# Altium PCB ESP32-PoE_Rev_G1.PcbDoc (part 3 of 3)
Units mm, origin at the board's own origin, x right, y up, seen from the top; angles counter-clockwise.
Board outline 28 x 75 mm, 2 copper layers (F.Cu, B.Cu); 132 components, 123 nets, 484 pads, 212 vias.
Unrouted connection lines stored in the file: 2.
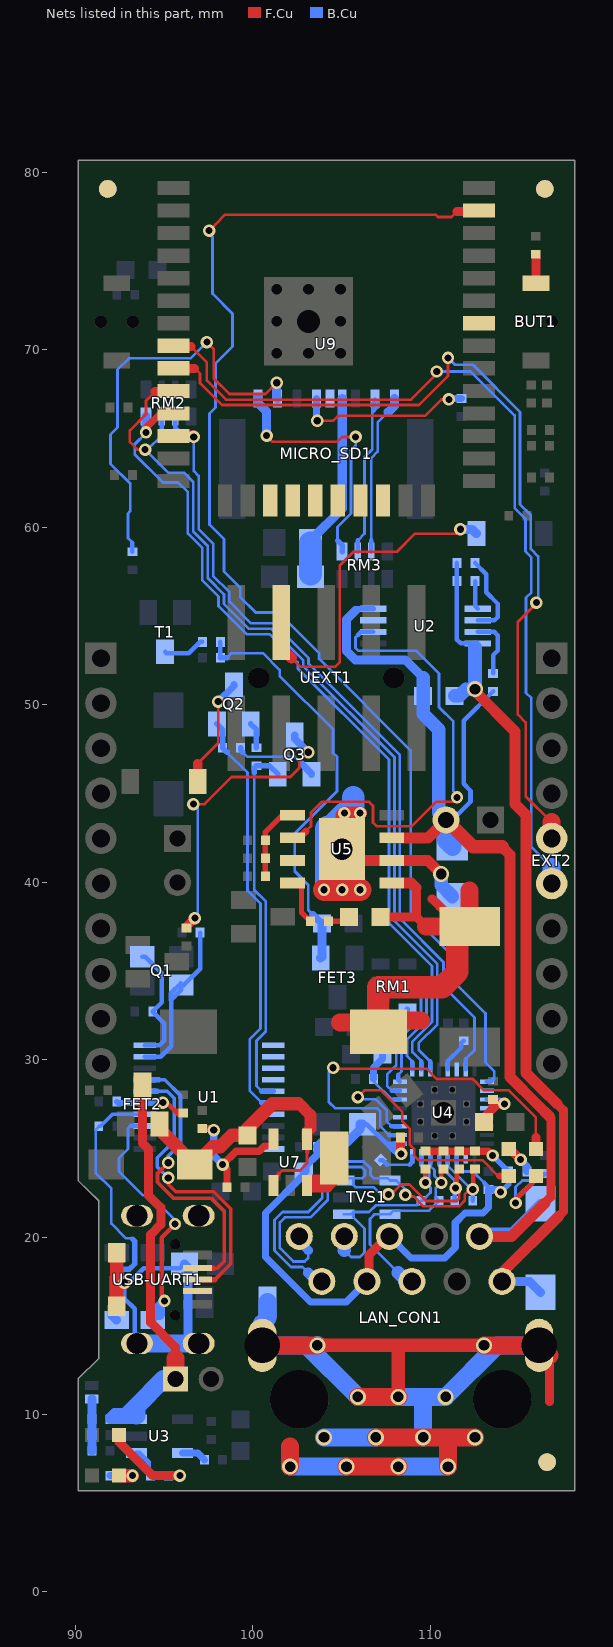
[diagram p3: the nets of this part, all layers, seen from the top]

## Via types
v1: diameter 0.7, hole 0.4, F.Cu to B.Cu, tented both sides, 119 vias
v2: diameter 0.9, hole 0.6, F.Cu to B.Cu, tented both sides, 89 vias
v3: diameter 0.8, hole 0.5, F.Cu to B.Cu, tented both sides, 4 vias

## Nets (pads, with @x,y where several pads share a name; then routed paths per layer and width w, separated by ;. In a path a pad name is that pad's centre, name@x,y a point inside that pad or via, vN(x,y) a via of type N, cw(c..) or ccw(c..) an arc to the next point about the centre after c; other vN are vias at no path point) (continued)
GPIO23\MDC(RMII): U4.17 U9.37 | length 72.5
  F.Cu w0.152: v1(97.536,76.723) 97.886,77.073 98.438,77.624 110.287,77.624 110.426,77.485 111.188,77.485 111.506,77.802
  F.Cu w0.508: 111.506,77.802 112.691,77.802 U9.37@112.74,77.851
  B.Cu w0.152: v1(97.536,76.723) 97.536,76.532 97.727,76.342 97.727,73.167 98.857,72.036 98.857,70.192 97.892,69.227 97.892,66.753 97.557,66.418 97.557,60.15 98.374,59.332 98.374,57.519 99.289,56.604 99.289,56.072 100.165,55.196 101.448,55.196 103.749,52.895 103.749,52.57 108.894,47.424 108.894,38.209 111.506,35.597 111.506,34.216 113.111,32.61 113.111,29.842 113.602,29.352 113.602,28.971 113.538,28.907
  B.Cu w0.254: U4.17@113.194,28.752 113.383,28.752 113.538,28.907
GPIO25\EMAC_RXD0(RMII): RM2.2.2 U4.11 U9.10 | length 51.6
  F.Cu w0.152: v1(93.932,64.378) 93.497,64.378 93.066,64.81 93.066,65.458 93.98,66.372 93.98,67.134 94.488,67.642
  F.Cu w0.508: 94.488,67.642 95.491,67.642 U9.10@95.54,67.691
  B.Cu w0.152: 94.869,65.179 94.068,64.378 v1(93.932,64.378) 95.24,63.07 96.139,63.07 96.642,62.567 96.642,59.771 97.46,58.953 97.46,57.14 98.374,56.226 98.374,55.686 99.779,54.282 101.067,54.282 102.834,52.514 102.834,52.189 107.98,47.043 107.98,37.821 110.399,35.401 110.399,31.991 109.347,30.939 109.347,30.558 109.994,29.911
  B.Cu w0.254: 94.869,65.179 RM2.2.2@94.869,66.245 ; U4.11@109.994,29.452 109.994,29.911
GPIO26\EMAC_RXD1(RMII): RM2.1.2 U4.10 U9.11 | length 48.1
  F.Cu w0.406: v1(93.98,65.355) 93.98,65.61 94.791,66.421 U9.11@95.54,66.421
  B.Cu w0.152: v1(93.98,65.355) 93.98,65.318 93.345,64.683 93.345,64.111 94.929,62.528 95.792,62.528 96.337,61.983 96.337,59.645 97.155,58.827 97.155,57.014 98.069,56.099 98.069,55.559 99.652,53.977 100.94,53.977 102.53,52.387 102.53,52.059 107.675,46.914 107.675,37.691 110.095,35.271 110.095,32.118 108.991,31.015 108.991,30.431 109.494,29.928 109.494,29.903
  B.Cu w0.254: U4.10@109.494,29.452 109.494,29.903
  B.Cu w0.508: v1(93.98,65.355) 93.98,65.85 RM2.1.2@93.98,66.245
GPIO27\EMAC_RX_CRS_DV: RM2.3.2 U4.15 U9.12 | length 46.2
  F.Cu w0.61: U9.12@95.54,65.151 96.624,65.151 v1(96.673,65.102)
  B.Cu w0.152: v1(96.673,65.102) 96.673,63.171 96.947,62.897 96.947,59.897 97.765,59.08 97.765,57.266 98.679,56.352 98.679,55.813 99.906,54.586 101.194,54.586 103.139,52.641 103.139,52.316 108.285,47.17 108.285,37.948 110.744,35.488 110.744,34.114 112.494,32.364 112.494,30.53 111.994,30.03
  B.Cu w0.254: RM2.3.2@95.631,66.245 95.631,65.61 96.139,65.102 v1(96.673,65.102) ; U4.15@111.994,29.452 111.994,30.03
GPIO32: EXT2.6 U9.8 | length 50.7
  F.Cu w0.152: U9.8@95.123,70.182 U9.8@95.537,70.182 ; 96.52,70.182 97.409,69.293 97.409,68.277 98.489,67.198 108.915,67.198 110.363,68.645 v1(110.363,68.785)
  F.Cu w0.508: U9.8@95.54,70.231 95.589,70.182 96.52,70.182
  B.Cu w0.152: v1(110.363,68.785) 112.268,68.785 114.755,66.298 114.755,61.091 115.367,60.479 115.367,58.642 115.697,58.311 115.697,56.339 115.392,56.034 115.392,50.675 115.697,50.37 115.697,41.988 116.84,40.845
  B.Cu w1.016: EXT2.6@116.84,39.926 116.84,40.845
GPIO33: EXT2.5 U9.9 | length 49.4
  F.Cu w0.152: 96.725,68.961 97.028,68.658 97.028,68.123 98.258,66.893 109.36,66.893 110.998,68.531 110.998,69.052 v1(110.998,69.547) ; v1(115.976,55.755) 115.976,55.722 114.935,54.68 114.935,49.449 115.379,49.005 115.379,44.846 116.84,43.385
  F.Cu w0.508: U9.9@95.54,68.961 96.725,68.961
  F.Cu w1.016: EXT2.5@116.84,42.466 116.84,43.385
  B.Cu w0.152: v1(110.998,69.547) 111.379,69.166 112.395,69.166 115.059,66.502 115.059,61.295 115.671,60.683 115.671,58.768 116.078,58.362 116.078,55.856 v1(115.976,55.755)
Net-(ACT1-Pad1): ACT1.1 R15.1 | length 4.9
  F.Cu w0.305: v1(114.808,21.922) 114.808,22.116 115.951,23.259 ACT1.1@115.951,23.446
  B.Cu w0.152: v1(114.808,21.922) 114.808,22.811 115.189,23.192 116.078,23.192 116.205,23.319
  B.Cu w0.254: 116.205,23.319 R15.1@116.459,23.573
Net-(ACT1-Pad2): ACT1.2 U4.3 | length 15.1
  F.Cu w0.152: v1(105.918,27.891) 106.299,28.272 107.213,28.272 108.417,27.068 108.417,26.535 108.839,26.113 108.839,25.224 109.093,24.97 109.093,24.589 109.347,24.335 112.932,24.335 113.821,23.446 113.919,23.446
  F.Cu w0.406: 113.919,23.446 ACT1.2@114.427,23.446
  B.Cu w0.152: v1(105.918,27.891) 106.045,27.764 106.934,27.764 107.544,27.154 107.544,26.519 107.811,26.252
  B.Cu w0.254: 107.811,26.252 U4.3@108.294,26.252
Net-(BAT1-Pad1): BAT1.1 FET2.3 R17.1 U3.3 | length 25.5
  F.Cu w0.508: FET2.3@93.787,28.577 93.787,25.29 94.112,24.965 94.112,22.357 94.813,21.657 94.813,20.723 94.234,20.144 94.234,15.191 95.631,13.794 95.631,13.159 ; BAT1.1@95.639,11.993 BAT1.1@95.989,11.993
  F.Cu w1.016: BAT1.1@95.631,12.016 95.631,13.159
  B.Cu w0.406: U3.3@93.442,9.728 U3.3@93.442,9.954
  B.Cu w0.508: 93.218,10.111 92.202,10.111 91.948,9.857 R17.1@91.948,9.73 91.95,9.728 U3.3@93.442,9.728
  B.Cu w1.016: U3.3@92.964,9.984 93.442,10.462 ; U3.3@93.442,9.954 93.442,10.462 ; BAT1.1@95.631,12.001 BAT1.1@95.639,11.993 ; BAT1.1@95.639,11.897 BAT1.1@95.639,11.993 ; 93.442,10.462 94.973,11.993 BAT1.1@95.639,11.993
Net-(BAT_SENS_E1-Pad2): BAT_SENS_E1.2 C19.1 R17.2 R22.1 | length 2.9
  B.Cu w0.508: C19.1@90.932,7.952 R22.1@90.932,8.841 R17.2@90.932,9.73 90.932,10.619 BAT_SENS_E1.2@90.932,10.873
Net-(BUT1-Pad2): BUT1.2 R47.1 | length 1.6
  F.Cu w0.508: R47.1@115.951,75.389 115.951,73.764 BUT1.2@115.959,73.756
Net-(C2-Pad2): C2.2 LAN_CON1.0 | length 70.5
  F.Cu w0.508: 116.713,10.746 LAN_CON1.0@116.713,13.318
  F.Cu w0.762: v2(103.632,13.9) 108.183,13.9 ; v2(108.204,11) 108.204,13.879 108.183,13.9 ; v2(113.03,13.9) 108.183,13.9
  F.Cu w1.016: LAN_CON1.0@100.531,13.9 v2(103.632,13.9) ; v2(102.108,7.063) 102.108,8.206 ; v2(105.283,7.063) v2(108.204,7.063) ; v2(105.918,11) v2(108.204,11) ; v2(106.934,8.714) v2(109.601,8.714) 110.998,8.714 ; v2(110.998,7.063) 110.998,8.714 ; v2(112.522,8.714) 110.998,8.714 ; v2(113.03,13.9) LAN_CON1.0@116.131,13.9 LAN_CON1.0@116.713,13.318
  B.Cu w0.508: LAN_CON1.0@116.131,13.9 116.713,13.318 116.713,10.873
  B.Cu w1.016: C2.2@100.838,16.334 100.838,15.445 100.531,15.138 LAN_CON1.0@100.531,13.9 103.018,13.9 v2(105.918,11) v2(108.204,11) 109.601,11 ; v2(102.108,7.063) v2(105.283,7.063) ; v2(103.632,13.9) v2@103.64,13.908 ; v2(104.013,8.714) v2(106.934,8.714) ; v2(108.204,7.063) v2(110.998,7.063) ; v2(109.601,8.714) 109.601,11 ; LAN_CON1.0@116.131,13.9 113.771,13.9 v2(110.871,11) 109.601,11
Net-(C3-Pad1): C3.1 L5.2 MICRO_SD1.4 | length 10.6
  B.Cu w0.508: C3.1@103.251,59.133 103.251,59.26 105.04,61.049 105.04,66.251 MICRO_SD1.4@105.04,67.259
  B.Cu w1.27: L5.2@103.251,57.355 C3.1@103.251,59.133
Net-(C4-Pad1): C4.1 Q1.1 U1.9 | length 10.1
  B.Cu w0.254: U1.9@93.916,30.166 94.805,30.166 95.402,30.763 95.402,33.327 95.377,33.352 ; Q1.1@95.948,34.305 95.377,33.733 95.377,33.352 ; C4.1@97.028,37.162 97.028,35.13 96.101,34.203 Q1.1@95.969,34.203 95.969,33.944 95.377,33.352
Net-(C5-Pad1): C5.1 Q1.2 U1.10 | length 6.9
  B.Cu w0.254: Q1.2@93.769,35.803 93.942,35.803 94.869,34.876 94.869,33.225 C5.1@94.361,32.717 94.361,32.692 94.996,32.057 94.996,31.074 94.738,30.816 U1.10@93.916,30.816
Net-(C6-Pad1): C6.1 D3.1 FET2.2 U7.1 U7.4 | length 17
  F.Cu w0.152: 101.473,23.573 101.651,23.751 102.667,23.751 103.058,24.142 103.058,24.782
  F.Cu w0.254: U7.1@101.158,22.908 101.158,23.258 101.473,23.573 ; 103.058,24.782 U7.4@103.058,25.508
  F.Cu w0.406: D3.1@96.734,24.081 D3.1@96.734,24.168
  F.Cu w0.61: 102.562,27.505 102.621,27.505 ; U7.4@103.058,25.508 103.058,25.92 103.251,26.113
  F.Cu w0.66: 102.621,27.505 103.251,26.875 103.251,26.113
  F.Cu w0.762: FET2.2@94.742,26.367 94.742,26.073 D3.1@96.734,24.081 97.75,25.097 98.171,25.097 98.806,25.732 C6.1@99.695,25.732 99.695,26.113 101.087,27.505 102.562,27.505
Net-(C8-Pad1): C8.1 R19.1 U1.5 | length 4.6
  F.Cu w0.254: v1(94.932,27.574) 95.123,27.574 95.14,27.574 95.585,27.129 ; C8.1@96.075,26.875 95.839,26.875 95.585,27.129 ; C8.1@96.075,27.002 95.948,27.129 95.585,27.129
  B.Cu w0.203: v1@94.925,27.566 v1(94.932,27.574)
  B.Cu w0.305: R19.1@92.329,27.637 R19.1@92.4,27.566
  B.Cu w0.33: R19.1@92.4,27.566 U1.5@93.916,27.566 v1@94.925,27.566
Net-(C10-Pad2): C10.2 FET3.1 R2.2 R3.1 | length 23.9
  B.Cu w0.152: 98.552,52.656 98.806,52.91 100.566,52.91 101.514,51.963 101.514,51.63 104.521,48.622 104.521,47.292 104.739,47.073 104.739,45.127 102.362,42.75 102.362,40.616 103.124,39.854 103.124,38.432 103.378,38.178
  B.Cu w0.254: R2.2@98.171,52.656 R3.1@98.171,53.545
  B.Cu w0.305: R2.2@98.171,52.656 98.552,52.656
  B.Cu w0.406: 103.378,38.178 C10.2@103.886,37.67
  B.Cu w0.508: FET3.1@103.825,35.729 103.886,35.79 C10.2@103.886,37.67
Net-(C11-Pad1): C11.1 C13.1 C15.1 C16.1 L1.2 LAN_CON1.4 LAN_CON1.5 R10.1 R11.1 R12.1 R13.1 R14.1 U4.1 U4.27 | length 46.7
  F.Cu w0.406: R11.1@109.728,24.843 R10.1@110.744,24.843 R13.1@111.633,24.843 R12.1@112.522,24.843 113.263,24.843 v1(113.51,24.596)
  F.Cu w0.508: LAN_CON1.4@106.426,17.5 106.553,17.627 106.553,19.001 107.592,20.04 LAN_CON1.5@107.696,20.04 ; C11.1@108.331,25.605 108.331,24.716 v1(108.356,24.691)
  B.Cu w0.152: 111.494,24.093 111.887,23.7 112.395,23.7 113.03,23.065
  B.Cu w0.254: L1.2@106.299,26.367 L1.2@106.172,26.367 106.426,26.367 107.541,25.252 ; U4.1@108.557,25.252 U4.1@108.294,25.252 ; 111.494,24.093 U4.27@111.494,24.552 ; 113.03,23.065 113.284,22.811 C15.1@113.284,22.684 ; 107.541,25.252 107.95,24.843 ; 107.541,25.252 U4.1@108.294,25.252 ; 107.95,24.843 107.95,25.097 108.105,25.252 U4.1@108.294,25.252 ; 107.95,24.843 108.102,24.691 v1(108.356,24.691) 108.204,24.843 108.204,25.162 U4.1@108.294,25.252
  B.Cu w0.305: v1(113.51,24.596) 114.406,23.7 R14.1@114.427,23.7 114.427,22.989 v1(113.97,22.532)
  B.Cu w0.406: C13.1@102.87,23.7 102.87,23.517 100.711,21.358 100.711,18.874 103.251,16.334 105.26,16.334 LAN_CON1.4@106.426,17.5 ; C13.1@102.997,23.7 102.997,24.002 103.632,24.637 C16.1@103.632,25.097 ; L1.2@106.045,26.304 L1.2@106.045,26.367 ; LAN_CON1.5@107.696,20.04 108.913,18.823 110.82,18.823 111.404,19.407 111.404,20.804 111.963,21.363 112.979,21.363 113.284,21.668 C15.1@113.284,22.684 113.817,22.684 v1(113.97,22.532)
  B.Cu w0.508: C16.1@103.632,25.097 103.861,25.326 105.289,25.326 106.045,26.081 L1.2@106.045,26.304 ; L1.2@106.045,26.367 L1.2@106.172,26.367 ; LAN_CON1.5@107.696,20.04 LAN_CON1.5@107.696,20.144
Net-(C12-Pad1): C12.1 D5.1 L4.1 U5.1 | length 28.4
  F.Cu w0.508: C12.1@107.188,38.051 109.22,38.051 ; 109.202,39.684 109.22,39.667 109.22,38.051 ; 109.757,37.514 109.22,38.051 ; 110.109,39.067 111.662,37.514 D5.1@112.217,37.514
  F.Cu w0.61: U5.1@107.829,39.956 108.931,39.956 109.202,39.684
  F.Cu w1.016: 104.902,32.082 106.569,32.082 L4.1@107.077,31.574 107.712,32.209 109.474,32.209 ; 109.757,37.514 D5.1@112.217,37.514 112.217,39.524
  F.Cu w1.27: L4.1@107.077,31.574 107.077,34.079 110.67,34.079 111.532,34.941 111.532,36.829 D5.1@112.217,37.514
Net-(C12-Pad2): C12.2 R33.2 | length 1.2
  F.Cu w0.305: R33.2@104.267,37.797 105.156,37.797 C12.2@105.41,38.051
Net-(C17-Pad1): C17.1 C18.1 U4.6 | length 3.6
  B.Cu w0.152: C18.1@106.807,28.907 106.807,28.78 107.835,27.752 U4.6@107.898,27.752
  B.Cu w0.254: U4.6@107.898,27.752 U4.6@108.294,27.752
  B.Cu w0.406: C18.1@106.807,28.907 106.807,29.415 106.807,29.542 107.315,30.05 C17.1@107.315,30.304
Net-(C21-Pad2): C21.2 R25.1 U4.19 | length 3.3
  F.Cu w0.508: C21.2@113.03,26.494 113.03,26.748 113.602,27.32 ; R25.1@113.538,27.764 113.538,27.383 113.602,27.32 ; v1(114.173,27.51) 113.792,27.51 113.602,27.32
  B.Cu w0.254: U4.19@113.194,27.752 113.931,27.752 v1(114.173,27.51)
Net-(C23-Pad2): C23.2 R34.1 R38.2 U5.5 | length 4.4
  F.Cu w0.305: R38.2@100.711,40.337 C23.2@100.711,41.353 R34.1@100.711,42.369 100.711,42.828 101.649,43.766 U5.5@102.229,43.766
Net-(CHRG1-Pad1): CHRG1.1 R8.1 | length 6.5
  F.Cu w0.254: CHRG1.1@92.456,8.841 CHRG1.1@92.456,8.968 ; 94.742,6.555 95.39,6.555 v1(95.885,6.555)
  F.Cu w0.508: CHRG1.1@92.456,8.841 92.456,8.46 94.361,6.555 94.742,6.555 v1(95.885,6.555)
  B.Cu w0.508: R8.1@95.25,6.555 v1(95.885,6.555)
Net-(D4-Pad1): D4.1 UEXT1.4 | length 17.9
  F.Cu w0.152: 102.184,52.631 102.667,52.148 104.648,52.148 104.902,52.402 104.902,57.863 105.664,58.625 108.127,58.625 109.143,59.641 111.446,59.641 v1(111.697,59.892)
  F.Cu w0.61: UEXT1.4@101.6,53.215 102.184,52.631
  B.Cu w0.508: v1(111.697,59.892) 112.191,59.892 112.359,59.892 D4.1@112.6,59.651
Net-(D6-Pad1): D6.1 U1.3 | length 15.4
  F.Cu w0.254: v1(95.02,16.409) 94.869,16.56 94.869,19.973 95.613,20.718 v1(95.613,20.736)
  B.Cu w0.152: 93.117,26.266 92.964,26.113 92.964,24.97 92.456,24.462 92.456,23.7 93.802,22.354 94.234,22.354 95.613,20.975 v1(95.613,20.736)
  B.Cu w0.254: 93.117,26.266 U1.3@93.916,26.266
  B.Cu w0.508: D6.1@94.297,15.572 94.297,15.686 v1(95.02,16.409) 94.805,16.194 94.805,15.636 94.742,15.572 94.483,15.572 D6.1@94.361,15.45
Net-(D7-Pad2): D7.2 R18.2 U1.4 | length 15.9
  B.Cu w0.152: R18.2@91.313,26.24 91.313,26.215 91.14,26.042 91.14,23.614 92.024,22.73 92.024,20.753 92.836,19.941 93.167,19.941 93.218,19.89
  B.Cu w0.203: R18.2@91.313,26.24 91.415,26.24 92.091,26.916 U1.4@93.916,26.916
  B.Cu w0.305: 92.075,16.08 92.075,17.731 92.532,18.188 93.04,18.188 93.345,18.493 93.345,19.763 93.218,19.89
  B.Cu w0.508: 92.075,16.08 92.075,15.577 D7.2@92.329,15.323
Net-(D9-Pad1): D9.1 Q2.3 | length 6.3
  F.Cu w0.152: 96.896,46.682 98.044,47.83 98.044,50.169 v1(98.052,50.177)
  F.Cu w0.508: D9.1@96.896,45.671 96.896,46.682
  B.Cu w0.406: v1(98.052,50.177) 98.933,51.058 Q2.3@98.933,51.132
Net-(FID1-PadFid1): FID1.Fid1
Net-(FID2-PadFid1): FID2.Fid1
Net-(FID3-PadFid1): FID3.Fid1
Net-(FID4-PadFid1): FID4.Fid1
Net-(FID5-PadFid1): FID5.Fid1
Net-(FID6-PadFid1): FID6.Fid1
Net-(L2-Pad1): L2.1 U7.3 | length 4.9
  F.Cu w0.406: L2.1@104.972,24.278 L2.1@104.972,24.843
  F.Cu w0.508: L2.1@104.591,24.462 104.591,23.897 103.962,23.268 103.418,23.268 U7.3@103.058,22.908 103.187,22.779 104.235,22.779 L2.1@104.648,23.192
Net-(L3-Pad1): L3.1 USB-UART1.0 | length 19.7
  F.Cu w0.762: USB-UART1.0@92.326,16.104 92.326,17.861 ; USB-UART1.0@92.326,19.104 92.326,17.861 ; v1(92.761,17.426) 92.326,17.861
  B.Cu w0.254: USB-UART1.0@93.476,14.004 93.453,14.004 93.345,14.112 93.345,15.953 92.761,16.537 v1(92.761,17.426) 93.04,17.426 93.853,18.239 95.885,18.239 L3.1@96.139,18.493
  B.Cu w0.508: L3.1@96.139,18.493 96.342,18.29 96.342,14.429 96.767,14.004 USB-UART1.0@96.946,14.004
  B.Cu w0.762: USB-UART1.0@93.476,14.004 USB-UART1.0@93.476,14.249 ; USB-UART1.0@97.409,21.16 USB-UART1.0@97.409,21.287
  B.Cu w1.016: USB-UART1.0@93.476,14.004 95.65,14.004 96.603,14.004 USB-UART1.0@96.647,14.048
Net-(LNK1-Pad1): LNK1.1 U4.2 | length 21.7
  F.Cu w0.152: v1(104.521,29.542) 104.572,29.491 109.776,29.491 110.36,28.907 112.395,28.907 113.03,28.272 114.427,28.272 115.951,26.748 115.951,25.605
  F.Cu w0.508: LNK1.1@115.951,24.97 115.951,25.605
  B.Cu w0.152: v1(104.521,29.542) 104.276,29.297 104.276,27.628 104.648,27.256 107.011,27.256 107.188,27.079 107.188,26.24 107.676,25.752
  B.Cu w0.254: 107.676,25.752 U4.2@108.294,25.752
Net-(LNK1-Pad2): LNK1.2 R14.2 | length 1.7
  F.Cu w0.508: LNK1.2@114.427,24.97 114.483,24.97 v1(115.09,24.363)
  B.Cu w0.406: v1(115.09,24.363) 115.443,24.01 R14.2@115.443,23.7
Net-(MICRO_SD1-Pad1): MICRO_SD1.1 RM3.3.1 | length 9.2
  B.Cu w0.152: 106.68,59.26 106.68,63.908 107.036,64.264 107.036,65.915 107.62,66.499
  B.Cu w0.254: RM3.3.1@106.68,58.625 106.68,59.26
  B.Cu w0.508: 107.632,66.499 107.99,66.857 MICRO_SD1.1@107.99,67.259
Net-(MICRO_SD1-Pad2): MICRO_SD1.2 RM3.2.1 | length 10.8
  B.Cu w0.152: 105.918,59.26 106.299,59.641 106.299,63.959 106.731,64.391 106.731,66.423 ; 106.731,66.423 106.731,66.639 ; 106.731,66.423 106.731,66.455 107.061,66.785 107.061,67.088 MICRO_SD1.2@106.89,67.259 ; 106.731,66.639 106.89,66.798 MICRO_SD1.2@106.89,67.259 ; 106.731,66.639 106.731,66.994 106.89,67.154 MICRO_SD1.2@106.89,67.259
  B.Cu w0.254: RM3.2.1@105.918,58.625 105.918,59.26
Net-(MICRO_SD1-Pad5): MICRO_SD1.5 R40.2 | length 9.9
  F.Cu w0.152: v1(103.632,66.009) 104.539,66.009 104.813,66.283 109.703,66.283 110.627,67.208 v1(111.051,67.208)
  B.Cu w0.406: MICRO_SD1.5@103.59,67.259 103.59,66.051 v1(103.632,66.009) ; v1(111.051,67.208) 111.104,67.261 R40.2@111.76,67.261
Net-(MICRO_SD1-Pad7): MICRO_SD1.7 R46.2 | length 24
  F.Cu w0.152: v1(97.409,70.436) 97.79,70.055 97.79,68.404 98.679,67.515 100.711,67.515 v1(101.346,68.15)
  B.Cu w0.152: 93.218,59.133 92.964,59.387 92.964,60.784 93.091,60.911 93.091,62.462 91.973,63.579 91.973,65.221 92.377,65.625 92.377,68.883 93.016,69.522 96.495,69.522 v1(97.409,70.436)
  B.Cu w0.254: R46.2@93.218,58.625 93.218,59.133
  B.Cu w0.508: v1(101.346,68.15) 101.346,67.303 MICRO_SD1.7@101.39,67.259
Net-(MICRO_SD1-Pad8): MICRO_SD1.8 RM3.1.1 | length 14.6
  F.Cu w0.152: v1(100.774,65.166) 101.119,64.821 104.748,64.821 105.022,65.095 v1(105.796,65.095)
  B.Cu w0.152: 104.775,59.26 104.775,60.022 105.537,60.784 105.537,64.34 105.796,64.6 v1(105.796,65.095)
  B.Cu w0.305: 104.775,59.26 105.029,59.006 RM3.1.1@105.029,58.625
  B.Cu w0.508: MICRO_SD1.8@100.29,67.259 100.29,67.009 100.774,66.524 v1(100.774,65.166)
Net-(MICRO_SD1-PadCD1): MICRO_SD1.CD1
Net-(PWR1-Pad1): PWR1.1 R5.1 | length 2
  F.Cu w0.762: PWR1.1@92.456,6.555 v1@93.217,6.555
  B.Cu w0.406: R5.1@91.948,6.555 v1@93.217,6.555
  other v1: 93.217,6.554
Net-(Q2-Pad1): Q2.1 R20.2 | length 1.5
  B.Cu w0.305: Q2.1@99.88,48.922 100.203,48.6 R20.2@100.203,47.576
Net-(Q2-Pad2): Q2.2 R21.1 U1.16 | length 23.6
  B.Cu w0.152: 98.552,47.322 99.695,46.179 99.695,39.524 100.432,38.788 100.432,31.752 99.822,31.142 99.822,28.257 100.513,27.566
  B.Cu w0.305: Q2.2@97.978,48.922 98.298,48.602 R21.1@98.298,47.576 98.552,47.322 ; 100.513,27.566 U1.16@101.155,27.566
Net-(Q3-Pad1): Q3.1 R21.2 | length 4.7
  B.Cu w0.152: R21.2@99.441,47.322 99.695,47.068 102.362,47.068 102.743,46.687
  B.Cu w0.305: R21.2@99.314,47.576 99.314,47.449 R21.2@99.441,47.322
  B.Cu w0.406: 102.743,46.687 103.312,46.118 Q3.1@103.312,46.088
Net-(Q3-Pad2): Q3.2 R20.1 U1.15 | length 21.1
  B.Cu w0.152: 100.076,46.179 100.076,39.575 100.736,38.915 100.736,31.599 100.203,31.066 100.203,28.526 100.513,28.216
  B.Cu w0.305: 100.076,46.179 100.076,46.433 R20.1@100.203,46.56 100.937,46.56 Q3.2@101.409,46.088 ; 100.513,28.216 U1.15@101.155,28.216
Net-(Q3-Pad3): Q3.3 R24.1 | length 16.6
  F.Cu w0.152: v1(96.647,44.401) 97.282,44.401 98.806,45.925 102.108,45.925 102.616,46.433 102.616,46.814 v1(103.124,47.322)
  F.Cu w0.508: R24.1@96.266,37.416 96.266,37.508 v1(96.73,37.972)
  B.Cu w0.152: v1(96.647,44.401) 96.901,44.147 96.901,38.143 v1(96.73,37.972)
  B.Cu w0.406: Q3.3@102.365,48.297 102.365,48.081 v1(103.124,47.322)
Net-(R3-Pad2): R3.2 T1.3 | length 2.4
  B.Cu w0.254: T1.3@95.054,52.986 95.131,52.91 96.393,52.91 97.028,53.545 R3.2@97.155,53.545
Net-(R6-Pad1): R6.1 U3.5 | length 1.4
  B.Cu w0.406: U3.5@96.042,7.828 96.899,7.828 R6.1@97.282,7.444
Net-(R7-Pad2): R7.2 U2.3 | length 3.5
  B.Cu w0.254: U2.3@112.678,54.109 113.609,54.109 113.792,53.926 113.792,53.037 113.538,52.783 R7.2@113.538,51.767
Net-(R8-Pad2): R8.2 U3.1 | length 1.7
  B.Cu w0.305: U3.1@93.442,7.828 93.597,7.828 94.107,7.317 94.107,6.682 R8.2@94.234,6.555
Net-(R23-Pad1): R23.1 U2.1 | length 1.6
  B.Cu w0.254: R23.1@112.522,56.974 112.522,55.565 U2.1@112.678,55.409
Net-(R26-Pad1): R26.1 U4.32 | length 2.3
  B.Cu w0.152: 107.569,24.081 107.696,24.081 108.839,24.081
  B.Cu w0.254: R26.1@107.188,24.335 107.315,24.335 107.569,24.081 ; 108.839,24.081 108.994,24.236 U4.32@108.994,24.552
Net-(R27-Pad2): R27.2 U2.2 | length 4.8
  B.Cu w0.254: R27.2@112.522,57.99 113.157,57.355 113.157,56.339 113.792,55.704 113.792,54.942 113.609,54.759 U2.2@112.678,54.759
Net-(R28-Pad1): R28.1 U5.2 U5.9 | length 25.2
  F.Cu w0.508: U5.9@105.029,41.861 U5.9@105.664,41.226
  F.Cu w0.61: U5.9@105.664,41.226 U5.2@107.829,41.226 109.855,41.226 v2(110.617,40.464)
  F.Cu w0.762: U5.9@105.029,41.861 105.029,43.766 v1(105.156,43.893) v1(106.045,43.893)
  F.Cu w1.27: v1(104.013,39.575) v1(106.045,39.575) ; v1(105.029,39.575) U5.9@105.029,41.861
  B.Cu w0.762: v2(110.617,40.464) 110.617,39.829 R28.1@111.252,39.194
  B.Cu w1.27: 104.267,43.004 v1(105.156,43.893) ; 105.537,40.083 105.537,42.242 105.41,42.242 U5.9@105.029,41.861 105.664,42.496 105.664,44.782
  B.Cu w1.524: 104.267,40.083 104.267,43.004
Net-(R29-Pad1): R29.1 R30.1 U7.5 | length 7.8
  F.Cu w0.406: R29.1@97.155,26.113 97.711,26.113 v1(97.795,26.029) ; R30.1@98.552,22.811 98.552,23.827 v1(98.298,24.081) 99.06,24.843 100.355,24.843 100.639,25.127 100.995,25.127 101.158,25.29 U7.5@101.158,25.508
  B.Cu w0.406: v1(97.795,26.029) 97.795,24.584 v1(98.298,24.081)
Net-(R33-Pad1): R33.1 U5.8 | length 2.7
  F.Cu w0.305: U5.8@102.229,39.956 102.464,39.956 102.743,39.677 102.743,38.305 R33.1@103.251,37.797
Net-(R41-Pad2): R41.2 U4.13 | length 2
  B.Cu w0.254: U4.13@110.994,29.452 110.994,29.919 111.76,30.685 111.76,30.939 R41.2@111.887,31.066
Net-(RM1-Pad1.2): RM1.1.2 U4.7 | length 5.6
  B.Cu w0.152: 107.843,28.252 107.569,28.526 107.569,29.161 108.077,29.669 108.077,31.447 108.712,32.082 108.712,32.336
  B.Cu w0.254: 107.843,28.252 U4.7@108.294,28.252
  B.Cu w0.305: 108.712,32.336 RM1.1.2@108.712,32.844
Net-(RM1-Pad2.2): RM1.2.2 U4.8 | length 6.2
  B.Cu w0.152: 108.204,29.161 108.382,29.339 108.382,31.272 109.474,32.364 109.474,33.479 109.22,33.733
  B.Cu w0.254: 108.204,29.161 108.204,28.842 U4.8@108.294,28.752
  B.Cu w0.305: RM1.2.2@108.712,33.733 109.22,33.733
Net-(RM1-Pad3.2): RM1.3.2 U4.9 | length 6.3
  B.Cu w0.152: 108.994,29.895 108.687,30.202 108.687,31.145 109.79,32.248 109.79,33.798 109.347,34.241
  B.Cu w0.254: RM1.3.2@108.712,34.495 109.093,34.495 109.347,34.241 ; U4.9@108.994,29.452 108.994,29.895
Net-(U1-Pad6): U1.6 USB-UART1.3 | length 16.8
  F.Cu w0.203: v1(95.232,23.333) 95.232,22.984 95.659,22.557 97.79,22.557 98.756,21.591 98.756,18.495 97.865,17.604
  F.Cu w0.305: USB-UART1.3@96.876,17.604 97.865,17.604
  B.Cu w0.203: 94.615,28.216 95.179,28.216 95.567,27.828 95.567,25.416 94.615,24.463 94.615,23.954 95.232,23.337 v1(95.232,23.333)
  B.Cu w0.305: U1.6@93.916,28.216 94.615,28.216
Net-(U1-Pad7): U1.7 USB-UART1.2 | length 16.7
  F.Cu w0.203: v1(95.232,24.192) 94.628,23.588 94.628,23.083 95.512,22.199 97.645,22.199 98.4,21.444 98.4,18.643 98.011,18.254 97.805,18.254
  F.Cu w0.305: USB-UART1.2@96.876,18.254 97.805,18.254
  B.Cu w0.203: 94.701,28.866 95.037,28.866 95.923,27.98 95.923,25.265 95.232,24.573 v1(95.232,24.192)
  B.Cu w0.305: U1.7@93.916,28.866 94.701,28.866
Net-(U1-Pad11): U1.11
Net-(U1-Pad12): U1.12
Net-(U1-Pad13): U1.13
Net-(U1-Pad14): U1.14
Net-(U1-Pad17): U1.17
Net-(U1-Pad20): U1.20
Net-(U2-Pad6): U2.6 U5.6 | length 26.8
  F.Cu w0.152: 102.997,42.877 103.275,43.155 103.275,43.917 103.886,44.528 106.553,44.528 106.777,44.304 106.777,43.357 106.988,43.147 108.95,43.147 110.331,44.528 111.252,44.528 v1(111.506,44.782)
  F.Cu w0.406: U5.6@102.229,42.496 102.616,42.496 102.997,42.877
  B.Cu w0.152: 105.918,53.926 105.791,53.799 105.791,53.197 105.951,53.037 109.22,53.037 110.49,51.767 110.49,49.862 111.303,49.049 111.303,45.138 111.506,44.934 v1(111.506,44.782)
  B.Cu w0.254: 105.918,53.926 106.101,54.109 U2.6@106.778,54.109
Net-(U2-Pad7): U2.7
Net-(U4-Pad4): U4.4
Net-(U4-Pad14): U4.14
Net-(U4-Pad18): U4.18
Net-(U4-Pad20): U4.20
Net-(U4-Pad26): U4.26
Net-(U5-Pad7): U5.7
Net-(U9-Pad17): U9.17
Net-(U9-Pad18): U9.18
Net-(U9-Pad19): U9.19
Net-(U9-Pad20): U9.20
Net-(U9-Pad21): U9.21
Net-(U9-Pad22): U9.22
Net-(U9-Pad32): U9.32
Net-(USB-UART1-Pad4): USB-UART1.4
RD+: LAN_CON1.3 R11.2 TVS1.1 TVS3.1 U4.31 | length 13.3
  F.Cu w0.254: v1(109.728,23.065) R11.2@109.728,23.827
  B.Cu w0.152: TVS1.1@105.126,21.287 105.537,21.287 TVS1.1@105.664,21.414 ; 105.156,19.255 105.537,18.874 106.045,18.874 106.299,19.128 106.299,20.474 105.664,21.109 TVS1.1@105.664,21.414 ; 109.494,24.061 109.494,24.058 109.931,23.621 109.931,23.268 v1(109.728,23.065) 110.012,22.781 110.012,22.506 109.555,22.049 TVS3.1@109.474,22.049 109.22,21.795 106.934,21.795 106.553,21.414 TVS1.1@105.664,21.414
  B.Cu w0.254: 109.494,24.061 U4.31@109.494,24.552
  B.Cu w0.762: 105.156,19.255 LAN_CON1.3@105.156,20.04
RD-: LAN_CON1.6 R10.2 TVS1.5 TVS3.2 U4.30 | length 12.8
  F.Cu w0.254: v1(110.617,23.065) 110.617,23.7 R10.2@110.744,23.827
  B.Cu w0.152: 108.204,17.985 106.604,19.585 106.604,21.03 106.86,21.287 TVS1.5@107.726,21.287 107.929,21.49 109.931,21.49 TVS3.2@110.49,22.049 110.317,22.222 110.317,22.765 v1(110.617,23.065) 110.236,23.446 110.236,23.771 109.994,24.013 109.994,24.069
  B.Cu w0.254: 109.994,24.069 U4.30@109.994,24.552
  B.Cu w0.762: 108.204,17.985 108.689,17.5 LAN_CON1.6@108.966,17.5
Spare1: C24.1 C27.1 D8.1 LAN_CON1.9 R7.1 R28.2 U2.8 U5.3 | length 64.8
  F.Cu w0.508: 116.459,21.922 116.797,22.26 116.797,26.713 116.713,26.797
  F.Cu w0.61: U5.3@107.829,42.496 109.875,42.496 C27.1@110.891,43.512 ; LAN_CON1.9@112.776,20.04 114.577,20.04 116.459,21.922 ; 114.046,41.988 114.49,41.544 114.49,29.02 116.057,27.453 116.713,26.797
  F.Cu w0.762: C27.1@110.891,43.512 112.415,41.988 114.046,41.988
  B.Cu w0.254: C27.1@110.891,43.512 111.252,43.512 112.268,44.528 112.268,45.163 111.887,45.544 111.887,49.1 R7.1@113.538,50.751
  B.Cu w0.305: 105.791,55.323 105.877,55.409 U2.8@106.778,55.409
  B.Cu w0.508: 105.791,55.323 105.283,54.815 105.283,53.019 105.773,52.529 108.585,52.529 109.601,51.513 ; LAN_CON1.9@112.776,20.04 113.032,20.296 114.619,20.296 D8.1@116.205,21.882
  B.Cu w0.762: 109.601,51.513 C24.1@109.601,50.497 109.601,49.481 110.49,48.592 110.49,43.913 C27.1@110.891,43.512
  B.Cu w1.016: C27.1@110.891,43.512 110.891,42.349 R28.2@111.252,41.988
Spare2: C24.2 D8.2 LAN_CON1.10 R23.2 R27.1 U2.4 | length 48.8
  F.Cu w0.508: 117.139,27.51 117.5,27.149 117.5,21.439 117.221,21.16
  F.Cu w0.61: v2(112.522,50.878) 112.522,50.756 114.783,48.496 114.783,44.404 115.403,43.783 115.403,29.246 116.356,28.293 117.139,27.51 ; LAN_CON1.10@114.046,17.5 114.046,17.985 117.221,21.16
  B.Cu w0.254: R27.1@111.506,57.99 R23.2@111.506,56.974 111.506,53.672 111.719,53.459 U2.4@112.678,53.459 112.522,53.303 112.522,53.24
  B.Cu w0.508: LAN_CON1.10@114.046,17.5 115.039,17.5 115.587,17.5 D8.2@116.205,16.882
  B.Cu w0.762: C24.2@111.379,50.497 111.633,50.497 112.014,50.878 v2(112.522,50.878) 112.522,53.24
TD+: LAN_CON1.1 R13.2 TVS1.3 TVS2.2 U4.29 | length 25.5
  F.Cu w0.152: v1(107.643,22.405) 107.798,22.405 108.354,22.961 108.831,22.961 109.754,22.038 111.495,22.038 111.633,22.176 111.633,22.557 v1(111.43,22.76)
  F.Cu w0.254: v1(111.43,22.76) 111.506,22.836 111.506,23.7 R13.2@111.633,23.827
  B.Cu w0.152: 103.124,19.255 103.124,18.823 102.921,18.62 102.286,18.62 101.524,19.382 101.524,20.83 101.803,21.109 103.251,21.109 104.216,22.074 104.216,23.649 104.521,23.954 106.121,23.954 106.322,23.753 106.322,23.469 106.172,23.319 TVS1.3@105.664,23.319 ; TVS1.3@105.126,23.187 105.258,23.319 TVS1.3@105.664,23.319 ; v1(107.643,22.405) 107.617,22.43 107.188,22.43 106.807,22.811 105.791,22.811 105.664,22.938 TVS1.3@105.664,23.319 ; 110.494,24.077 111.354,23.217 111.354,22.836 v1(111.43,22.76)
  B.Cu w0.254: 110.494,24.077 U4.29@110.494,24.552 ; TVS2.2@111.379,22.049 111.379,22.709 v1(111.43,22.76)
  B.Cu w0.508: LAN_CON1.1@102.616,20.04 102.616,19.763 103.124,19.255
TD-: LAN_CON1.2 R12.2 TVS1.4 TVS2.1 U4.28 | length 25
  F.Cu w0.152: v1(108.595,22.377) 108.688,22.284 109.074,22.284 109.626,21.732 111.62,21.732 111.938,22.049 111.938,22.405 112.217,22.684 v1(112.395,22.684)
  F.Cu w0.254: v1(112.395,22.684) 112.414,22.703 112.414,23.719 R12.2@112.522,23.827
  F.Cu w0.762: LAN_CON1.2@103.863,17.477 LAN_CON1.2@103.886,17.5
  B.Cu w0.152: 103.124,17.985 102.794,18.315 102.159,18.315 101.219,19.255 101.219,20.957 101.676,21.414 103.124,21.414 103.911,22.201 103.911,23.776 104.394,24.259 106.248,24.259 106.627,23.88 106.627,23.499 106.807,23.319 107.594,23.319 TVS1.4@107.726,23.187 108.082,23.187 108.595,22.674 v1(108.595,22.377) v1@108.595,22.384 ; 110.994,24.085 110.994,24.016 112.326,22.684 v1(112.395,22.684)
  B.Cu w0.254: 110.994,24.085 U4.28@110.994,24.552 ; TVS2.1@112.395,22.049 v1(112.395,22.684)
  B.Cu w0.61: 103.124,17.985 103.609,17.5 LAN_CON1.2@103.886,17.5
pads on no net: BUT1.cream BUT1.Un1 BUT1.Un2 LAN_CON1.Un1 LAN_CON1.Un2 RM1.4.1 RM1.4.2 RST1.cream RST1.Un1 RST1.Un2 U1.1 U1.2 U1.18 U9.Past UEXT1.past UEXT1.Un1 UEXT1.Un2 USB-UART1.Un1 USB-UART1.Un2

## Polygon pours and split planes (outlines as drawn)
Net-(R28-Pad1) on B.Cu "B.Cu-Net-(R28-Pad1)" (solid, remove dead copper, pour order 8): 106.807,38.178 106.807,47.068 104.521,47.068 104.521,45.163 102.235,42.877 102.235,38.178
Net-(C2-Pad2) on B.Cu "B.Cu-Net-(C2-Pad2)" (solid, remove dead copper, pour order 7): 117.221,5.92 101.092,5.92 101.092,7.698 101.092,8.333 101.092,11.635 100.457,12.27 100.457,14.81 103.505,14.81 104.648,14.81 109.347,14.81 110.49,14.81 117.221,14.81
GND on B.Cu "B.Cu-GND" (solid, remove dead copper, pour order 5): 124.46,0.586 83.82,0.586 83.82,86.946 124.46,86.946
Net-(C12-Pad1) on F.Cu "F.Cu-Net-(C12-Pad1)" (solid, remove dead copper, pour order 9): 100.965,31.066 112.649,31.066 113.792,32.209 113.792,42.496 108.204,42.496 108.204,39.194 106.807,39.194 100.965,33.352
Net-(C2-Pad2) on F.Cu "F.Cu-Net-(C2-Pad2)" (solid, remove dead copper, pour order 6): 117.212,5.92 100.321,5.92 100.321,12.08 99.686,12.715 99.686,14.81 117.212,14.81
GND on F.Cu "F.Cu-GND" (solid, remove dead copper, pour order 4): 121.92,3.126 86.36,3.126 86.36,84.406 121.92,84.406

## Keep-outs
F.Cu:
  region: 113.474,78.564 112.078,78.564 112.078,79.58 113.474,79.58
  region: 96.075,78.437 94.869,78.437 94.869,79.58 96.075,79.58
  region: 99.06,60.848 97.917,60.848 97.917,62.118 99.06,62.118
  region: 100.33,55.704 99.949,55.704 99.949,55.958 100.33,55.958
  region: 102.489,22.43 101.727,22.43 101.727,23.446 102.489,23.446
B.Cu:
  region: 94.615,29.288 93.472,29.288 93.472,29.796 94.615,29.796
  region: 112.649,24.335 112.141,24.335 112.141,24.843 112.649,24.843
  region: 113.411,24.843 112.776,24.843 112.776,25.224 113.411,25.224
  region: 107.724,34.432 106.708,34.432 106.708,34.813 107.724,34.813
  region: 107.569,32.336 106.68,32.336 106.68,33.733 107.569,33.733
Edge.Cuts:
  lines w0.254: 90.15,5.696 118.15,5.696 ; 90.15,5.696 90.15,12.016 ; 90.15,5.696 118.15,5.696 ; 90.15,5.696 90.15,12.016 ; 90.15,12.016 91.313,13.159 ; 90.15,12.016 91.313,13.159 ; 90.15,23.192 91.313,22.049 ; 90.15,23.192 90.15,80.696 ; 90.15,23.192 91.313,22.049 ; 90.15,23.192 90.15,80.696 ; 90.15,80.696 118.15,80.696 ; 90.15,80.696 118.15,80.696 ; 91.313,13.159 91.313,22.049 ; 91.313,13.159 91.313,22.049 ; 118.15,5.696 118.15,80.696 ; 118.15,5.696 118.15,80.696

## Silkscreen, mask and mechanical layers (free items; w line width, h text height)
F.SilkS:
  text "Rev.G" at 114.96,58.124 h1.02
  text "ESP32-PoE" at 98.483,57.898 h2.54
  text "+5V" at 91.045,53.965 h0.76
  text "GPI39" at 115.748,53.962 h0.76
  text "1" at 93.046,52.177 h1.27
  text "1" at 115.144,52.177 h1.27
  text "+3V3" at 91.114,51.178 h0.51
  text "GPI36" at 116.495,51.178 h0.51
  text "GND" at 91.193,48.639 h0.51
  text "GPI35" at 116.498,48.638 h0.51
  text "ESP_EN" at 92.505,46.499 h0.51 r45
  text "GPI34" at 116.495,46.098 h0.51
  text "1" at 97.999,44.684 h1.27
  text "GPIO0" at 91.082,43.558 h0.51
  text "GPIO33" at 116.221,43.558 h0.51
  text "GPIO1" at 91.103,41.019 h0.51
  text "GPIO32" at 116.218,41.018 h0.51
  text "GPIO2" at 91.085,38.479 h0.51
  text "GPIO16" at 116.215,38.478 h0.51
  text "GPIO3" at 91.088,35.938 h0.51
  text "GPIO15" at 116.218,35.938 h0.51
  text "GPIO4" at 91.463,33.399 h0.51
  text "GPIO14" at 116.215,33.399 h0.51
  text "GPIO5" at 91.085,30.858 h0.51
  text "GPIO13" at 116.221,30.858 h0.51
  text "-" at 98.73,12.807 h1.02
  text "+" at 94.623,12.77 h1.02 r90
B.SilkS:
  text "(C) 2021" at 94.104,76.035 h0.64
  text "www.olimex.com" at 103.943,74.591 h1.02
  text "RoHS" at 98.982,71.416 h1.02
  text "Compliant" at 97.815,69.415 h1.02
  text "1" at 108.866,67.05 h0.76
  text "1" at 114.59,52.502 h1.02
  text "1" at 93.508,52.121 h1.02
  text "+" at 111.07,45.091 h1.02
  text "+" at 94.306,39.884 h1.02
  text "+" at 94.369,12.215 h1.02 r90
  text "-" at 99.136,11.918 h1.02
Eco2.User:
  lines w0.254: 90.15,41.196 118.15,41.196 ; 104.15,5.696 104.15,76.696

## Text inside footprints (layer, text, board x,y; h text height)
C25: F.SilkS "+" at 94.407,39.677 h1.27 r90; F.SilkS "+" at 93.29,38.487 h1.02 r90
C27: F.SilkS "+" at 108.463,45.168 h1.27; F.SilkS "+" at 110.592,44.863 h1.27
Logo_OSHW: B.SilkS "open" at 112.273,7.675 h1.02; B.SilkS "hardware" at 106.89,7.589 h1.02
MICRO_SD1: B.SilkS "Card Detect" at 105.08,61.417 h0.5; B.SilkS "Normal Open Switch" at 105.592,62.37 h0.5
Q1: B.SilkS "o" at 97.428,33.486 h1.27
Sign_PB-Free: B.SilkS "Pb" at 115.803,73.435 h1.7
U1: B.SilkS "o" at 93.973,24.227 h1.27 r90
U2: B.SilkS "o" at 114.446,55.203 h1.27
U5: F.SilkS "o" at 109.721,40.064 h1.27 r90
U9: Dwgs.User "ESP32-WROOM-32D" at 102.087,76.096 h0.89; Dwgs.User "! Keep Out Zone !" at 101.699,83.041 h1; F.SilkS "o" at 93.834,78.952 h1.27; F.SilkS "Antenna" at 102.943,83.2 h1.27; F.SilkS "1" at 97.754,78.835 h1.02; F.SilkS "38" at 109.583,78.827 h1.02; F.SilkS "15" at 98.711,63.651 h1.02 r90; F.SilkS "24" at 110.139,63.6 h1.02 r90
UEXT1: F.SilkS "1" at 97.11,49.891 h1.27; F.SilkS "2" at 97.009,52.427 h1.27; F.Fab "10" at 103.881,47.762 h1.13
USB-UART1: F.Cu "Внимание! Има фрезоване направено с Drill Slots!!!" at 53.379,-21.321 h3.81; F.Fab "pcb edge" at 91.74,17.287 h0.3 r90; F.Fab "VBUS" at 93.941,18.96 h0.51; F.Fab "D-" at 94.606,18.214 h0.51; F.Fab "D+" at 94.531,17.464 h0.51; F.Fab "ID" at 94.867,16.714 h0.51; F.Fab "GND" at 94.379,15.86 h0.51